# Altium PCB Controll Board_PCB.PcbDoc
Units mm, origin at the board's own origin, x right, y up, seen from the top; angles counter-clockwise.
Board outline 152.4 x 101.6 mm, 2 copper layers (Top Layer, Bottom Layer); 25 components, 20 nets, 92 pads, 6 vias.
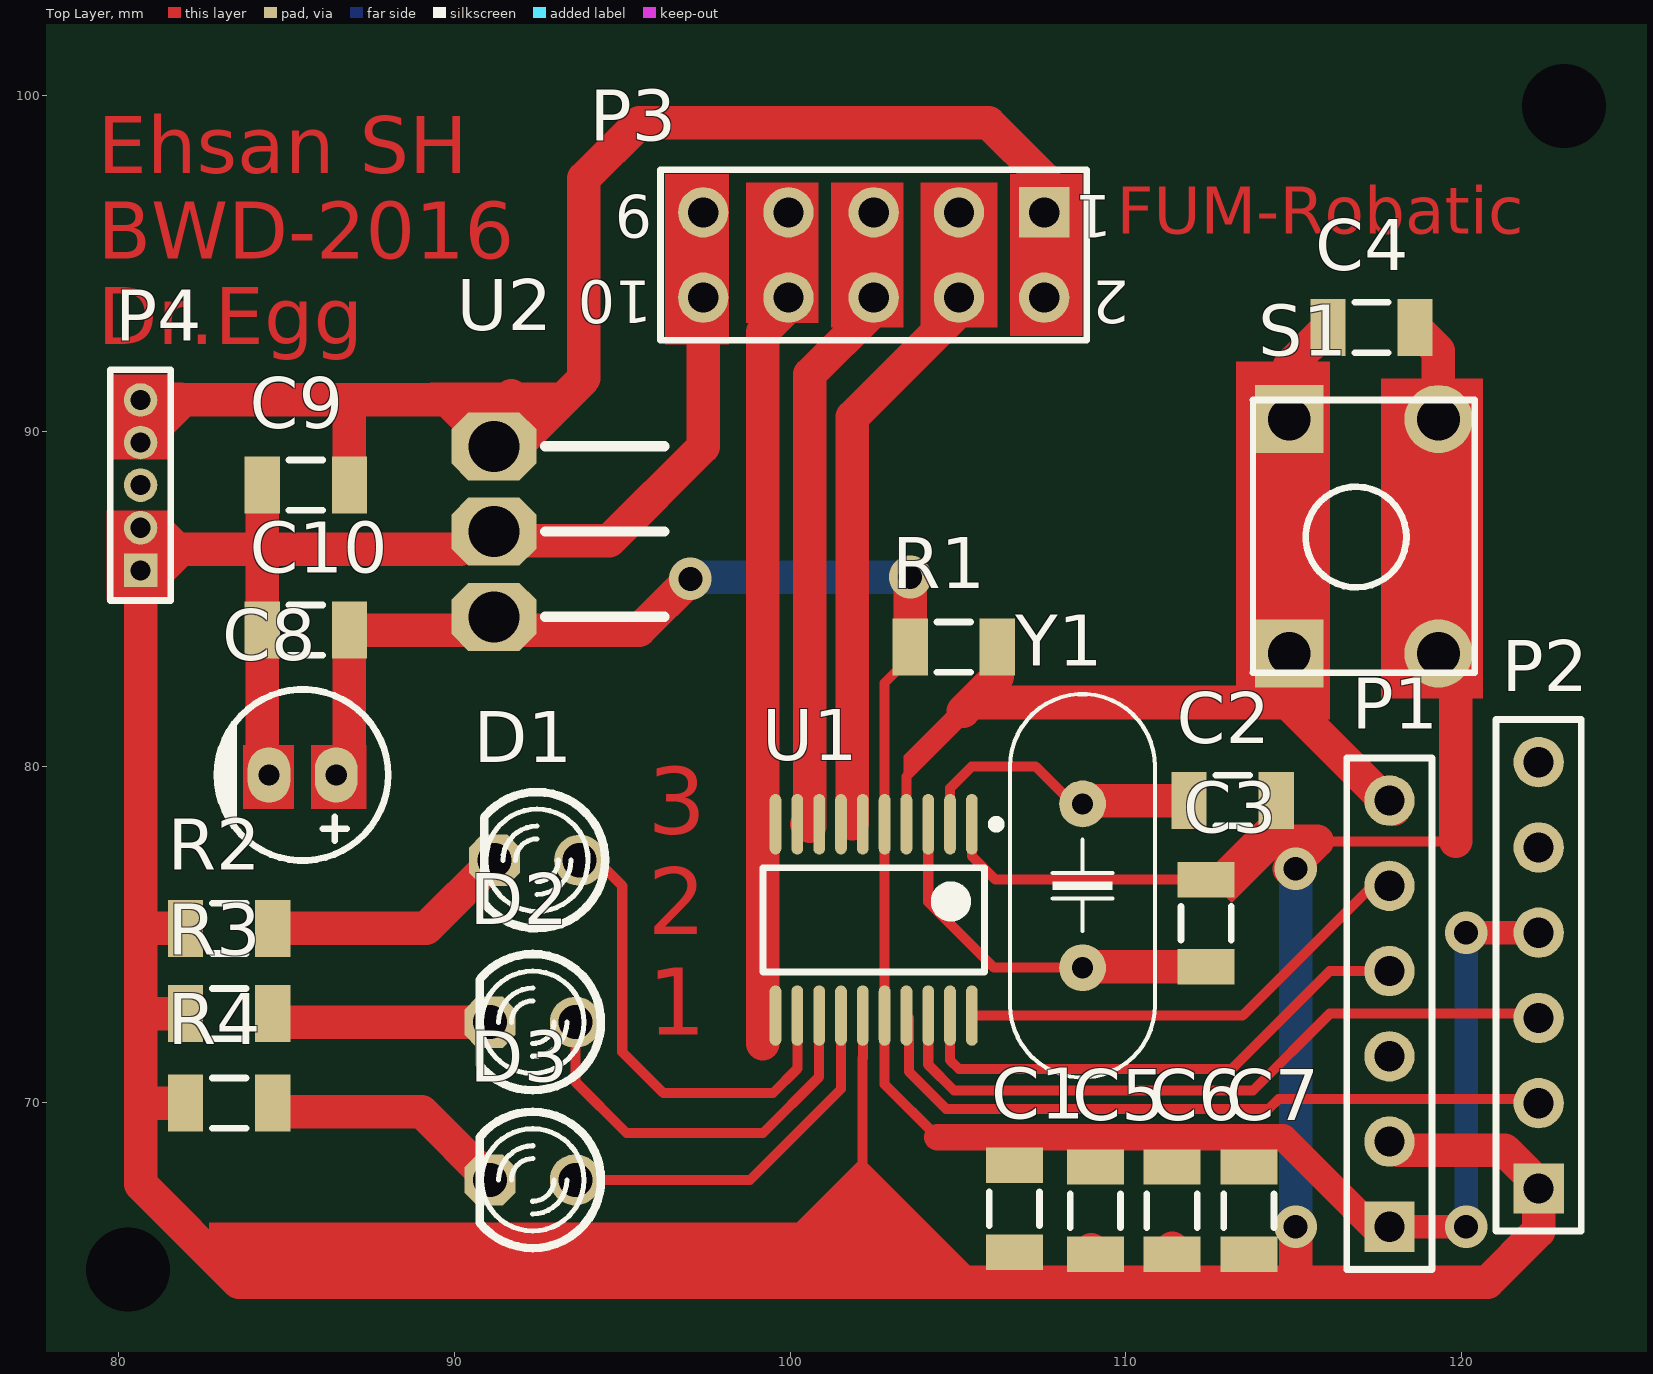
[diagram p0: Top Layer view]
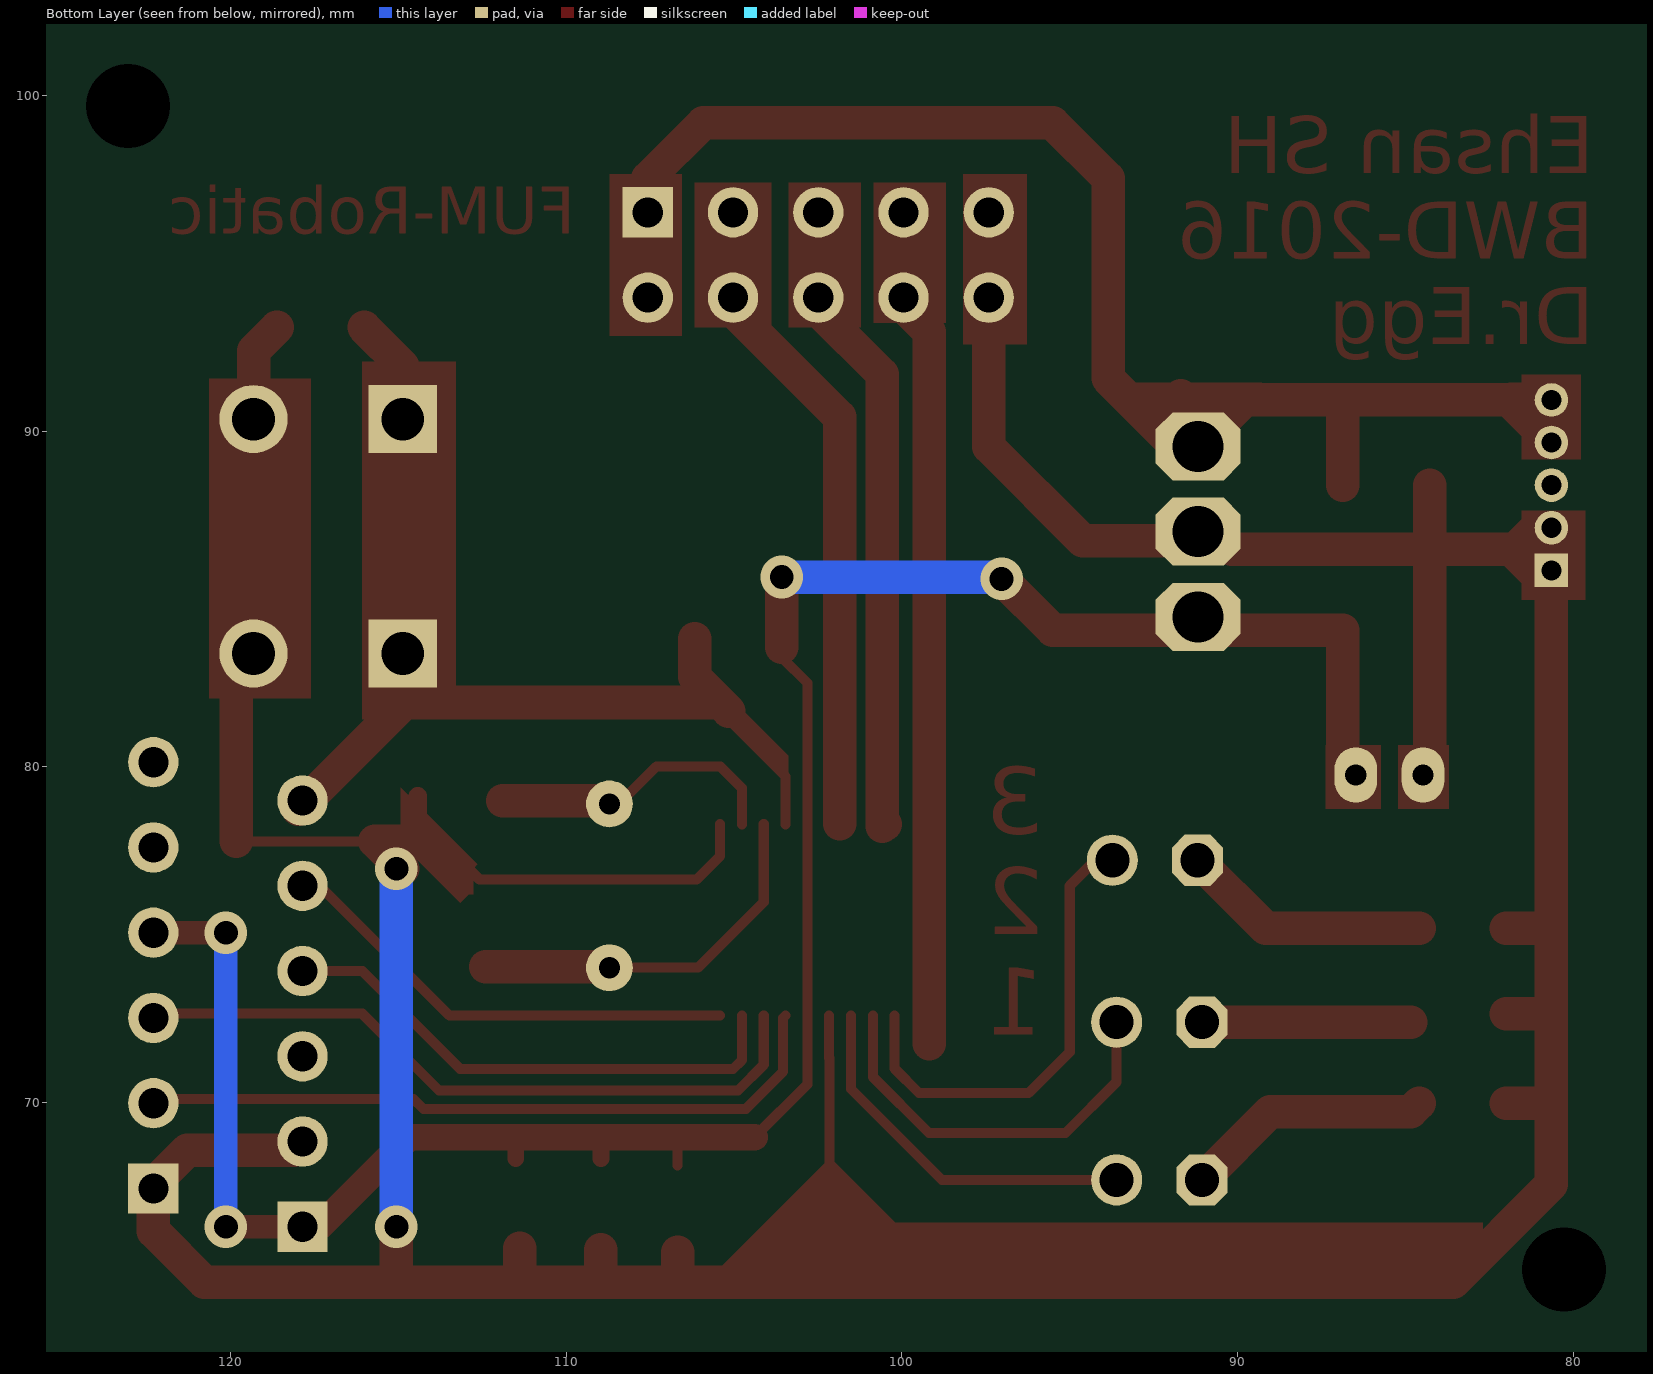
[diagram p1: Bottom Layer view, seen from below]
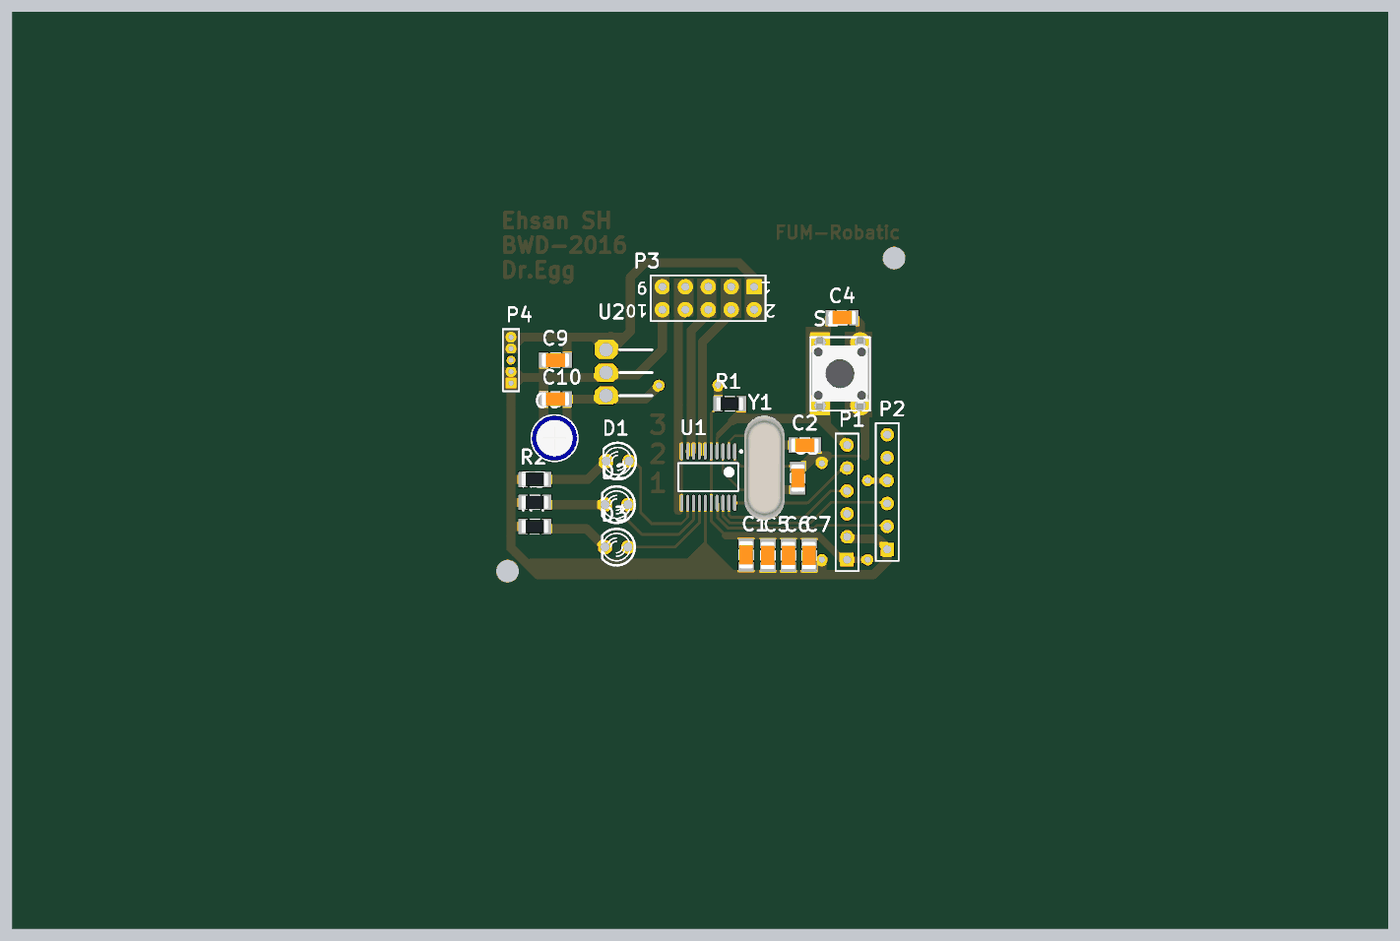
[diagram p2: 3D render of the assembled board from above, using the file's embedded part models]

## Layer stack, top to bottom
Top Solder: solder mask 0.0102, Solder Resist, Dk 3.5
Top Layer: signal copper 0.0356
Dielectric 1: dielectric 0.32, FR-4, Dk 4.8
Bottom Layer: signal copper 0.0356
Bottom Solder: solder mask 0.0102, Solder Resist, Dk 3.5

## Board outline
25.4,25.4 177.8,25.4 177.8,127 25.4,127

## Design rules (kind name [scope] priority, off if disabled: settings)
Clearance [All] p1: gap=0.254
PolygonConnect [All] p1: connectstyle=Relief reliefconductorwidth=0.254 reliefentries=4 polygonreliefangle="90 Angle" airgapwidth=0.254
RoutingVias [All] p1: holewidth=0.711 width=1.27 viastyle="Through Hole" minholewidth=0.711 minwidth=1.27 maxholewidth=0.711 maxwidth=1.27
SolderMaskExpansion [All] p1: expansion=0.102
Width [All] p1: maxlimit=1 minlimit=0.3 preferedwidth=0.7 minimp=50.000000 maximp=50.000000 favimp=50.000000
30 further rules are at their usual default settings.

## Components (designator, comment, footprint, x,y, rotation, side; value= is the part's Value field where it differs from the comment)
C1 "10uf" SMD_CAP_1206 106.68,65.532 r90 top
C2 "22PF" SMD_CAP_1206 111.887,78.994 r0 top
C3 "22PF" SMD_CAP_1206 112.395,74.041 r90 top
C4 "10uf" SMD_CAP_1206 118.618,93.091 r180 top
C5 "10uF" SMD_CAP_1206 109.093,68.072 r270 top
C6 "100nF" SMD_CAP_1206 111.379,68.072 r270 top
C7 "100nF" SMD_CAP_1206 113.665,68.072 r270 top
C8 "470uf" "cap 01" 85.471,79.756 r0 top
C9 "1u" SMD_CAP_1206 86.868,88.392 r180 top
C10 "1u" SMD_CAP_1206 86.868,84.074 r180 top
D1 "LED" My_LED3MM 92.456,77.216 r180 top
D2 "LED" My_LED3MM 92.329,72.39 r180 top
D3 "LED" My_LED3MM 92.329,67.691 r180 top
P1 "ProgrammerSocket" HDR1X6 117.856,66.294 r90 top
P2 "UART" HDR1X6 122.301,67.437 r90 top
P3 "Header 5X2" HDR2X5 107.569,96.52 r180 top
P4 "MHDR1X5" MHDR1X5 80.645,85.852 r90 top
R1 "10K" "RES 1206 (3216X08L)" 106.172,83.566 r180 top
R2 "330" "RES 1206 (3216X08L)" 84.582,75.184 r180 top
R3 "330" "RES 1206 (3216X08L)" 84.582,72.644 r180 top
R4 "330" "RES 1206 (3216X08L)" 84.582,69.977 r180 top
S1 "Switch PB" "Switch - Push to On" 117.094,86.868 r90 top
U1 "STM32F030F4P6" STM-TSSOP20_N 102.489,75.438 r270 top
U2 "LF33" My_TO-220 91.186,89.535 r270 top
Y1 "8 MHz" "XTAL Small" 108.712,76.454 r90 top

## Footprints (in the part's own frame and the unit in brackets; to place one, negate y for a bottom-side part, rotate by r counter-clockwise, add the part's x,y. Pads: shape width x height; smd on the part's side, far side on the other; paste and mask are expansions set on the pad)
"cap 01" [mm]
  oval 1.27x1.651 hole 0.635: 1(1,0) 2(-1,0)
  silkscreen extent -2.55,-2.55 2.55,2.55, body extent -2.53,-2.53 2.53,2.53, height 12.54
HDR1X6 [mm] "Connector; Header; 6 Position"
  rect 1.5x1.5 hole 0.9: 1(0,0)
  round 1.5 hole 0.9: 2(2.54,0) 3(5.08,0) 4(7.62,0) 5(10.16,0) 6(12.7,0)
  silkscreen extent -1.27,-1.27 13.97,1.27
HDR2X5 [mm] "Connector; Header; 5x2 Position"
  rect 1.5x1.5 hole 0.9: 1(0,0)
  round 1.5 hole 0.9: 2(0,2.54) 3(2.54,0) 4(2.54,2.54) 5(5.08,0) 6(5.08,2.54) 7(7.62,0) 8(7.62,2.54) 9(10.16,0) 10(10.16,2.54)
  silkscreen extent -1.27,-1.27 11.43,3.81
MHDR1X5 [mm] "Connector; Header; 5 Position"
  rect 1x1 hole 0.6: 1(0,0)
  round 1 hole 0.6: 2(1.27,0) 3(2.54,0) 4(3.81,0) 5(5.08,0)
  silkscreen extent -0.9,-0.9 5.98,0.9
My_LED3MM [mil]
  round 60 hole 40: A(-50,0)
  oct 60x60 hole 40: K(50,0)
  silkscreen extent -80,-80 62,80
My_TO-220 [mil]
  oct 80x100 hole 60: 1(-0.5,-0.5) 2(99.5,-0.5) 3(199.5,-0.5)
  silkscreen extent -1,60 200,200
"RES 1206 (3216X08L)" [mm] "Chip Resistor, 2-Leads, Body 3.2x1.6mm, IPC High Density _ (0.125 W)"
  rect 1.05x1.7 smd: 1(0,0) 2(2.596,0)
  silkscreen extent 0.8,-0.75 1.8,0.75, body extent -0.23,-0.76 2.82,0.76, height 0.6
SMD_CAP_1206 [mm]
  rect 1.05x1.7 smd: 1(0,0) 2(2.596,0)
  silkscreen extent 0.8,-0.75 1.8,0.75, body extent -0.22,-0.77 2.82,0.75, height 0.75
STM-TSSOP20_N [mm] "SOP, 20-Leads, Body 6.6x4.5mm, Pitch 0.65mm, IPC Medium Density"
  oval 1.8x0.35 smd: 1(-2.85,2.925) 2(-2.85,2.275) 3(-2.85,1.625) 4(-2.85,0.975) 5(-2.85,0.325) 6(-2.85,-0.325) 7(-2.85,-0.975) 8(-2.85,-1.625) 9(-2.85,-2.275) 10(-2.85,-2.925) 11(2.85,-2.925) 12(2.85,-2.275) 13(2.85,-1.625) 14(2.85,-0.975) 15(2.85,-0.325) 16(2.85,0.325) 17(2.85,0.975) 18(2.85,1.625) 19(2.85,2.275) 20(2.85,2.925)
  silkscreen extent -2.97,-3.3 1.55,3.78, body extent -2.25,-3.3 2.25,3.3, height 1.2
"Switch - Push to On" [mil]
  rect 80x80 hole 50: 1(-137.5,87.5) 1(137.5,87.5)
  round 80 hole 50: 2(-137.5,-87.5) 2(137.5,-87.5)
  silkscreen extent -160,-130 160,130, body extent -155,-121 157,123, height 205
"XTAL Small" [mil]
  round 55 hole 25: 1(-96.06,0) 2(96.06,0)
  silkscreen extent -225,-85 225,85, body extent -226,-89 226,89, height 140

## Part data
C1 C2 C3 C4 C5 C6 C7 C9 C10: library part Cap-Bipolar, "Bipolar Capacitor"
C8: library part Cap-Polar, "Polar Capacitor"
D1 D2 D3: "Typical INFRARED GaAs LED"
P1 P2: library part "Header 6", "Header, 6-Pin"
P3: "Header, 5-Pin, Dual row"
P4: "Header, 5-Pin"
R1 R2 R3 R4: library part Resistor, "Resistor"
S1: "Push Button Switch"
U1: "ARM Cortex-M0 32-bit MCU, 16 KB Flash, 4 KB Internal RAM, 15 I/Os, 20-pin TSSOP, -40 to 85 degC, Tube"
U2: library part 7805, "Regulator"
Y1: library part XTAL, "XTAL Crystal"

## Free pads (board coordinates)
  round 1.524 hole 2.5: 2(80.264,65.024) 3(123.063,99.695)

## Via types
v1: diameter 1.27, hole 0.711, Top Layer to Bottom Layer, 6 vias

## Nets (pads, with @x,y where several pads share a name; then routed paths per layer and width w, separated by ;. In a path a pad name is that pad's centre, name@x,y a point inside that pad or via, vN(x,y) a via of type N, cw(c..) or ccw(c..) an arc to the next point about the centre after c; other vN are vias at no path point)
+5: C9.1 P3.1 P3.2 P4.4 P4.5 U2.1 | length 45.3
  Top Layer w1: P4.5 P4.4 81.915,90.932 86.868,90.932 ; C9.1 86.868,90.932 ; 91.694,91.059 91.173,90.538 U2.1 ; P3.2 P3.1 107.569,97.536 105.918,99.187 95.505,99.187 93.854,97.536 93.854,91.575 91.827,89.548 U2.1 ; 86.868,90.932 89.789,90.932 U2.1
"COIL1 INPUT": P3.3 P3.4 U1.6 U1.7 | length 19.5
  Top Layer w1: 101.854,78.303 101.854,90.424 105.029,93.599 P3.4 P3.3
"COIL2 INPUT": P3.5 P3.6 U1.8 U1.9 | length 19.2
  Top Layer w1: 100.494,78.287 100.584,78.287 100.584,78.232 100.585,78.233 100.585,91.695 102.489,93.599 P3.6 P3.5
"COIL3 INPUT": P3.7 P3.8 U1.10 U1.11 | length 25.1
  Top Layer w1: 99.187,71.755 99.187,92.964 99.949,93.726 P3.8 P3.7
GND: C1.1 C2.2 C3.2 C4.1 C5.2 C6.2 C7.2 C8.2 C9.2 C10.2 P1.2 P2.1 P3.9 P3.10 P4.1 P4.2 R2.2 R3.2 R4.2 S1.2 U1.1 U1.15 U2.2 | length 164.9
  Top Layer w0.3: 102.16,64.643 102.16,71.32 102.164,71.324 U1.15 ; U1.1 105.414,77.339 106.116,76.637 C3.2 112.578,76.637 113.665,77.724 114.427,77.724 ; 114.483,77.78 C2.2 ; 115.697,77.78 119.832,77.78 ; S1.2@119.316,83.376 S1.2@119.832,82.86
  Top Layer w0.55: 114.427,77.724 C2.2@114.427,79.121
  Top Layer w1: 80.772,69.977 R4.2 ; 80.772,72.644 R3.2 ; 80.772,75.184 R2.2 ; C9.2 84.272,86.487 ; C8.2 84.272,79.955 C10.2 84.272,86.487 ; P3.9 P3.10 97.409,89.535 94.615,86.741 91.44,86.741 U2.2 90.691,87.008 90.17,86.487 84.272,86.487 ; 106.68,64.77 C1.1 ; C5.2@108.966,65.603 108.966,64.643 ; 111.379,64.77 C6.2@111.379,65.659 ; 114.483,77.78 115.697,77.78 114.879,76.962 v1(115.062,76.962) ; 115.062,64.77 v1(115.062,66.294) ; P1.2 118.11,68.58 121.285,68.58 122.301,67.564 122.301,66.167 120.777,64.643 108.966,64.643 ; C4.1 119.316,92.392 119.316,90.361 S1.2@119.316,83.376 ; 119.832,77.78 S1.2@119.832,82.86 ; 84.272,86.487 80.645,86.487 P4.1 80.645,67.564 83.566,64.643 102.16,64.643 108.966,64.643
  Bottom Layer w1: v1(115.062,66.294) v1(115.062,76.962)
"LED COIL1": D3.A U1.14 | length 11.2
  Top Layer w0.3: D3.A 98.806,67.691 101.514,70.399 U1.14
"LED COIL2": D2.A U1.13 | length 12.2
  Top Layer w0.3: D2.A 93.599,70.612 95.123,69.088 99.187,69.088 100.864,70.765 U1.13
"LED COIL3": D1.A U1.12 | length 14.1
  Top Layer w0.3: D1.A 94.234,77.216 94.996,76.454 94.996,71.501 96.22,70.277 99.487,70.277 100.214,71.004 U1.12
NetC2_1: C2.1 U1.2 Y1.2 | length 9.2
  Top Layer w0.3: U1.2 104.764,79.364 105.41,80.01 107.315,80.01 108.431,78.894 Y1.2 Y1.2@109.093,78.894
  Top Layer w1: Y1.2@108.785,78.994 C2.1
NetC3_1: C3.1 U1.3 Y1.1 | length 11.4
  Top Layer w0.3: U1.3 104.114,75.972 106.072,74.014 Y1.1 108.712,74.041 Y1.1@108.739,74.041
  Top Layer w1: Y1.1@108.739,74.041 C3.1
NetD1_K: D1.K R2.1 | length 7.4
  Top Layer w1: R2.1 89.154,75.184 D1.K
NetD2_K: D2.K R3.1 | length 6.2
  Top Layer w1: R3.1@84.836,72.39 D2.K
NetD3_K: D3.K R4.1 | length 7.4
  Top Layer w1: R4.1 84.836,69.723 89.027,69.723 D3.K
NRST: C4.2 P1.6 R1.1 S1.1 U1.4 | length 30.4
  Top Layer w0.3: U1.4 103.464,79.715 105.156,81.407 105.156,81.661
  Top Layer w1: 105.156,81.661 106.172,82.677 R1.1@106.172,83.82 ; 107.061,81.915 114.681,81.915 ; C4.2 114.871,91.94 114.871,90.361 114.871,83.376 114.871,81.852 P1.6@117.983,78.74
RX: P2.3 U1.18 | length 20.9
  Top Layer w0.3: U1.18 104.114,71.125 104.881,70.358 113.792,70.358 116.078,72.644 P2.3@122.301,72.644
SWDCLK: P1.5 U1.20 | length 14
  Top Layer w0.3: U1.20 113.482,72.588 117.348,76.454 P1.5
SWDIO: P1.4 U1.19 | length 15.7
  Top Layer w0.3: U1.19 104.764,71.258 105.029,70.993 113.157,70.993 116.078,73.914 P1.4
SWO: P1.3
TX: P2.2 U1.17 | length 21
  Top Layer w0.3: U1.17 103.535,72.517 103.535,70.92 104.651,69.804 114.254,69.804 114.554,70.104 P2.2@122.301,70.104
VCC: C1.2 C5.1 C6.1 C7.1 C8.1 C10.1 P1.1 P2.4 R1.2 U1.5 U1.16 U2.3 | length 69.6
  Top Layer w0.3: R1.2 103.576,83.256 102.814,82.494 U1.5 U1.16 102.814,70.541 104.394,68.961 ; C1.2 106.68,68.961
  Top Layer w0.5: C5.1@108.966,68.326 108.966,69.088 ; C6.1@111.506,68.326 111.506,69.088 ; P1.1@117.348,66.294 P1.1
  Top Layer w0.7: P1.1 v1(120.142,66.294) ; v1(120.142,75.057) P2.4
  Top Layer w0.8: 104.394,68.961 106.68,68.961 114.681,68.961 P1.1@117.348,66.294
  Top Layer w1: C8.1 86.868,80.153 C10.1 95.504,84.074 v1(97.028,85.598) ; R1.2 v1(103.576,85.654)
  Bottom Layer w0.7: v1(120.142,66.294) v1(120.142,75.057)
  Bottom Layer w1: v1(97.028,85.598) 97.084,85.654 v1(103.576,85.654)
pads on no net: P2.5 P2.6 P4.3

## Other copper
Top Layer:
  rectangle net +5: 79.756,89.154 81.534,91.694
  rectangle net GND: 79.629,84.963 81.534,87.63
  rectangle net GND: 83.693,78.74 85.217,80.645
  rectangle net VCC: 85.725,78.74 87.376,80.645
  rectangle net GND: 96.266,92.583 98.171,97.663
  rectangle net "COIL3 INPUT": 98.679,93.218 100.838,97.409
  rectangle net "COIL2 INPUT": 101.219,93.091 103.378,97.409
  rectangle net "COIL1 INPUT": 103.886,93.091 106.172,97.409
  rectangle net +5: 106.553,92.837 108.712,97.663
  rectangle net NRST: 105.283,81.407 107.569,82.423
  rectangle net GND: 117.602,82.042 120.65,91.567
  rectangle net NRST: 113.284,81.407 116.078,92.075
  rectangle net GND: 82.677,65.024 100.203,66.421
  region net +5: 81.915,91.44 80.391,91.44 80.391,91.313 80.137,91.059 81.28,90.805
  region net GND: 81.534,87.63 81.534,87.376 82.042,86.868 82.042,85.979 81.407,85.344 81.28,85.471 81.28,87.376
  region net NRST: 104.838,81.788 104.331,81.28 104.331,80.899 104.331,80.561 104.838,80.899
  region net NRST: 104.331,81.28 103.378,80.328 103.378,79.629 104.415,80.666 104.584,80.666 104.584,81.026
  region net GND: 102.16,68.326 105.589,64.897 98.933,64.897 98.933,65.151 102.108,68.326
  region net GND: 114.935,77.724 113.157,75.946 112.903,76.2 112.776,76.2 112.776,76.962 112.649,77.089 114.935,79.375
  region net +5: 93.218,91.44 91.326,89.548 91.173,89.548 89.281,91.44
  text "FUM-Robatic" at 109.728,95.885 h1.4
  text "Ehsan SH / BWD-2016 / Dr.Egg" at 79.375,92.583 h1.7
  text "3 / 2 / 1" at 95.758,72.009 h2

## Silkscreen, mask and mechanical layers (free items; w line width, h text height)
Mechanical 1:
  lines w0.254: 78.359,62.865 78.359,102.108 124.841,102.108 124.841,62.865 78.359,62.865

## Text inside footprints (layer, text, board x,y; h text height)
P3: Top Overlay "10" at 95.885,94.488 h1.27 r180; Top Overlay "9" at 95.885,97.028 h1.27 r180; Top Overlay "1" at 109.601,97.028 h1.27 r180; Top Overlay "2" at 110.109,94.488 h1.27 r180